# Altium PCB Button.PcbDoc
Units mil, origin at the board's own origin, x right, y up, seen from the top; angles counter-clockwise.
Board outline 639.4 x 1302.4 mil, 2 copper layers (Top Layer, Bottom Layer); 8 components, 0 nets, 18 pads, 8 vias.
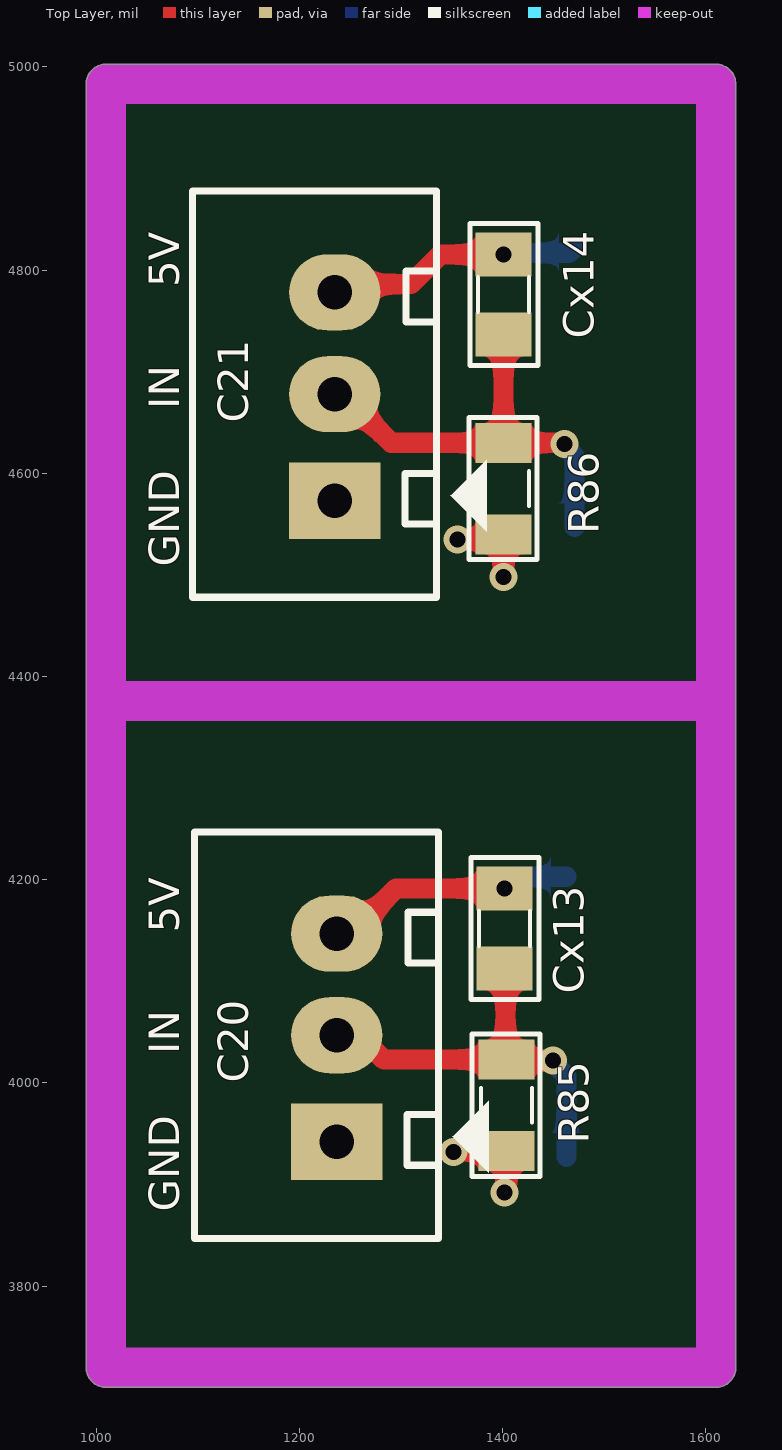
[diagram p0: Top Layer view]
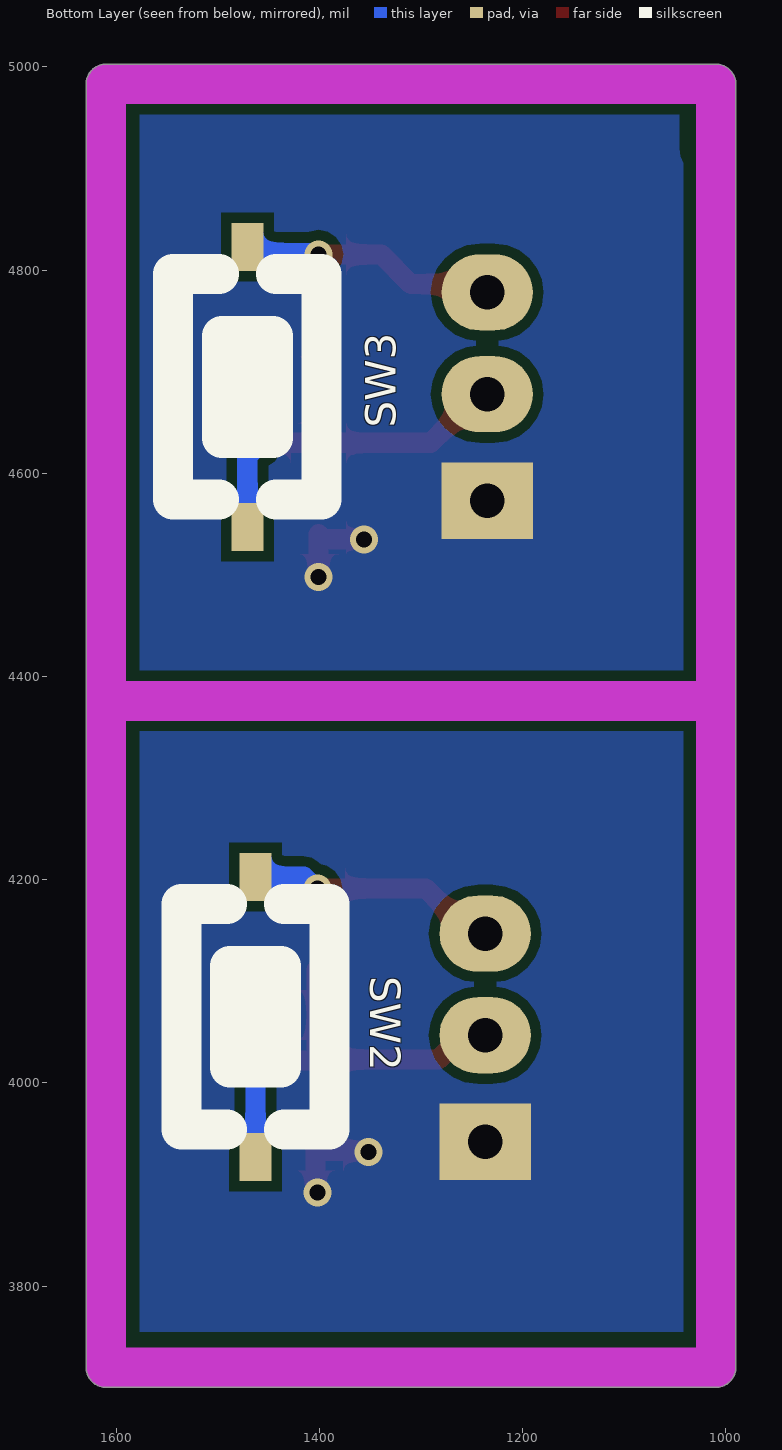
[diagram p1: Bottom Layer view, seen from below]

## Layer stack, top to bottom
Top Solder: solder mask 0.4, Solder Resist, Dk 3.5
Top Layer: signal copper 1.4
Dielectric 1: dielectric 12.6, FR-4, Dk 4.8
Bottom Layer: signal copper 1.4
Bottom Solder: solder mask 0.4, Solder Resist, Dk 3.5

## Board outline
1010,3700.3 cw(c1010,3720) 990.3,3720 990.3,4983 cw(c1010,4983) 1010,5002.7 1610,5002.7 cw(c1610,4983) 1629.7,4983 1629.7,3720 cw(c1610,3720) 1610,3700.3

## Design rules (kind name [scope] priority, off if disabled: settings)
Clearance [All] p1: gap=10 ignorepadtopadclearanceinfootprint=FALSE
PlaneConnect [All] p1: planeconnectstyle=Direct reliefexpansion=20 reliefentries=4 reliefconductorwidth=10 reliefairgap=10
PolygonConnect [All] p1: connectstyle=Direct reliefconductorwidth=10 reliefentries=4 polygonreliefangle="90 Angle" airgapwidth=10
RoutingVias [All] p1: holewidth=28 width=50 viastyle="Through Hole" minholewidth=28 minwidth=50 maxholewidth=28 maxwidth=50
SolderMaskExpansion [All] p1: expansion=4 istentingtop=FALSE
Width [All] p1: maxlimit=30 minlimit=10 preferedwidth=20
29 further rules are at their usual default settings.

## Components (designator, comment, footprint, x,y, rotation, side; value= is the part's Value field where it differs from the comment)
C20 "Header3" Header3 1237,3947 r90 top
C21 "Header3" Header3 1235,4578 r90 top
Cx13 "104" CN-SMD-0805 1402,4152 r90 top value=33pF
Cx14 "104" CN-SMD-0805 1401,4776 r90 top value=33pF
R85 "10k" RES-SMD-0805 1404,3978 r270 top
R86 "10k" RES-SMD-0805 1401,4585 r270 top
SW2 "SW" SW1-SMD 1463,4065 r90 bottom value="SW chip 2 pin"
SW3 "SW" SW1-SMD 1471,4685 r90 bottom value="SW chip 2 pin"

## Footprints (in the part's own frame and the unit in brackets; to place one, negate y for a bottom-side part, rotate by r counter-clockwise, add the part's x,y. Pads: shape width x height; smd on the part's side, far side on the other; paste and mask are expansions set on the pad)
CN-SMD-0805 [mil]
  rect 43.31x55 smd paste+0 mask-55: 1(-39.36,0.01) 2(39.37,0.01)
  silkscreen extent -70,-34 70,33, body extent -39,-25 39,25, height 31
Header3 [mil] "CON 3"
  rect 75x90 hole 34 paste+0 mask-90: 1(-5,0)
  oval 75x90 hole 34 paste+0 mask-90: 2(100,0) 3(200,0)
  silkscreen extent -100,-150 300,140, body extent -95,-90 295,136, height 276
RES-SMD-0805 [mil]
  rect 39.37x55 smd paste+0 mask-55: 1(-45,0) 2(45,0)
  silkscreen extent -70,-34 70,33, body extent -39,-25 39,25, height 31
SW1-SMD [mm]
  rect 1.2x0.8 smd paste+0 mask-1.2: 1(-3.5,0) 2(3.5,0)
  silkscreen extent -2.82,-1.85 2.82,1.85, body extent -3.05,-1.85 3.05,1.85, height 2.5

## Part data
C20 C21: "Header IDC, 3 x 1 Pin Vertical 2.54mm Pitch (Non-Boxed, Male)", Manufacturer="W¨¹rth Elektronik eiSos GmbH", partNo=613002143121, ComponentLink1 Description=Manufacturer, ComponentLink1URL=http://www.we-online.com, ComponentLink2 Description=Datasheet, ComponentLink2URL=http://katalog.we-online.de/em/datasheet/6130xx143121.pdf, Created by="Karrer Zheng", Created Date="29 March 2013", NoPins=02
Cx13 Cx14: library part CN
R85 R86: library part Res-SMD, "Resistor", Manufacturer="Generic Components", Class=Passive, Published=08/06/2000, Publisher="Altium Hobart Technology Centre"
SW2 SW3: library part SW2, "Switch button 2 pin"

## Via types
v1: diameter 27.56, hole 15.75, Top Layer to Bottom Layer, 8 vias

## Nets (pads, with @x,y where several pads share a name; then routed paths per layer and width w, separated by ;. In a path a pad name is that pad's centre, name@x,y a point inside that pad or via, vN(x,y) a via of type N, cw(c..) or ccw(c..) an arc to the next point about the centre after c; other vN are vias at no path point)
pads on no net: C20.1 C20.2 C20.3 C21.1 C21.2 C21.3 Cx13.1 Cx13.2 Cx14.1 Cx14.2 R85.1 R85.2 R86.1 R86.2 SW2.1 SW2.2 SW3.1 SW3.2
copper on no net: | length 1543.8
  Top Layer w20: 1235,4678 1242.5,4678 1290.5,4630 1401,4630 ; 1235,4778 1243.25,4786.25 1310,4786.25 1339.13,4815.37 v1(1400.99,4815.37) ; 1237,4047 1259.38,4047 1283.38,4023 1404,4023 ; 1237,4147 1251.21,4147 1295.58,4191.37 v1(1401.99,4191.37) ; v1(1352,3932) 1353,3933 1404,3933 1404,3894 v1(1402,3892) ; v1@1354,4538 1354,4537 v1(1356,4535) 1396,4535 1401,4540 v1(1401,4498) ; 1401,4736.63 1401,4630 ; 1401.99,4112.64 1403,4111.63 1403,4024 1404,4023 ; v1(1450,4022) 1405,4022 1404,4023 ; v1(1461,4629) 1460,4630 1401,4630
  Bottom Layer w20: v1(1400.99,4815.37) 1402.44,4816.82 1465.25,4816.82 1471,4822.57 1471,4822.8 ; v1(1401.99,4191.37) 1404.04,4191.37 1415.46,4202.8 1463,4202.8 ; v1(1450,4022) 1450,4019.95 1463,4006.95 1463,3927.2 ; v1(1461,4629) 1461,4626.95 1471,4616.95 1471,4547.2

## Polygon pours and split planes (outlines as drawn)
no net on Bottom Layer "NONET_L02_P002" (solid, remove dead copper, pour order 2): 1030,4359 1588,4359 1588,3745 1032,3745
no net on Bottom Layer "NONET_L02_P001" (solid, remove dead copper, pour order 1): 1034,4963 1588,4963 1588,4396 1032,4396
no net on Bottom Layer "NONET_L02_P000" (solid, pour order 0): 1030,4359

## Keep-outs
Keep-Out Layer:
  lines w39.37: 1015,4376 1609,4376 ; 1010,3720 1610,3720 1610,4983 1010,4983 1010,4914 1010,3720

## Silkscreen, mask and mechanical layers (free items; w line width, h text height)
Top Overlay:
  text "5V" at 1082,4783 h30 r90
  text "IN" at 1082,4663 h30 r90
  text "GND" at 1082,4508 h30 r90
  text "5V" at 1082,4148 h30 r90
  text "IN" at 1082,4028 h30 r90
  text "GND" at 1082,3873 h30 r90